# Altium PCB LiBattery-ChargeAndDischarge.PcbDoc
Units mil, origin at the board's own origin, x right, y up, seen from the top; angles counter-clockwise.
Board outline 1280 x 1379 mil, 2 copper layers (Top Layer, Bottom Layer); 38 components, 24 nets, 126 pads, 27 vias.
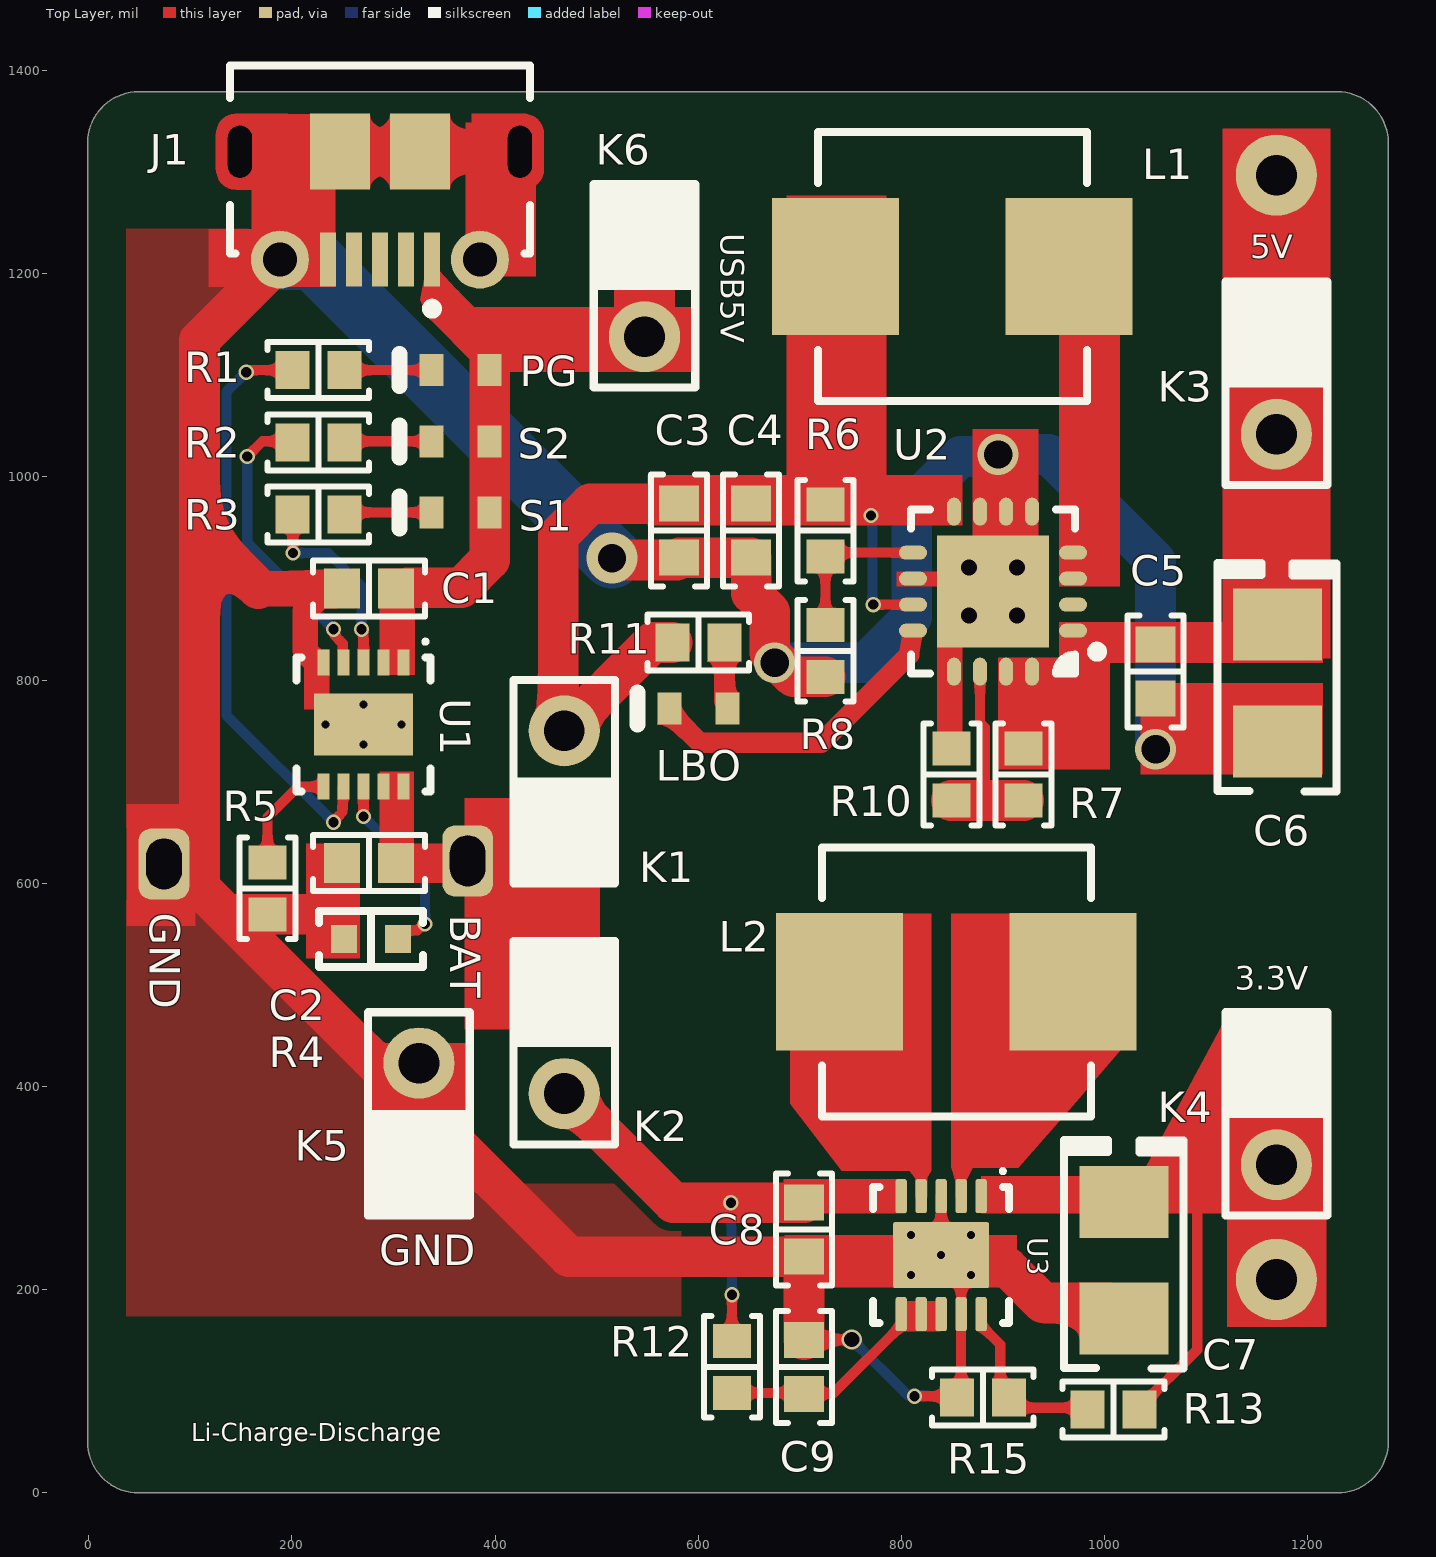
[diagram p0: Top Layer view]
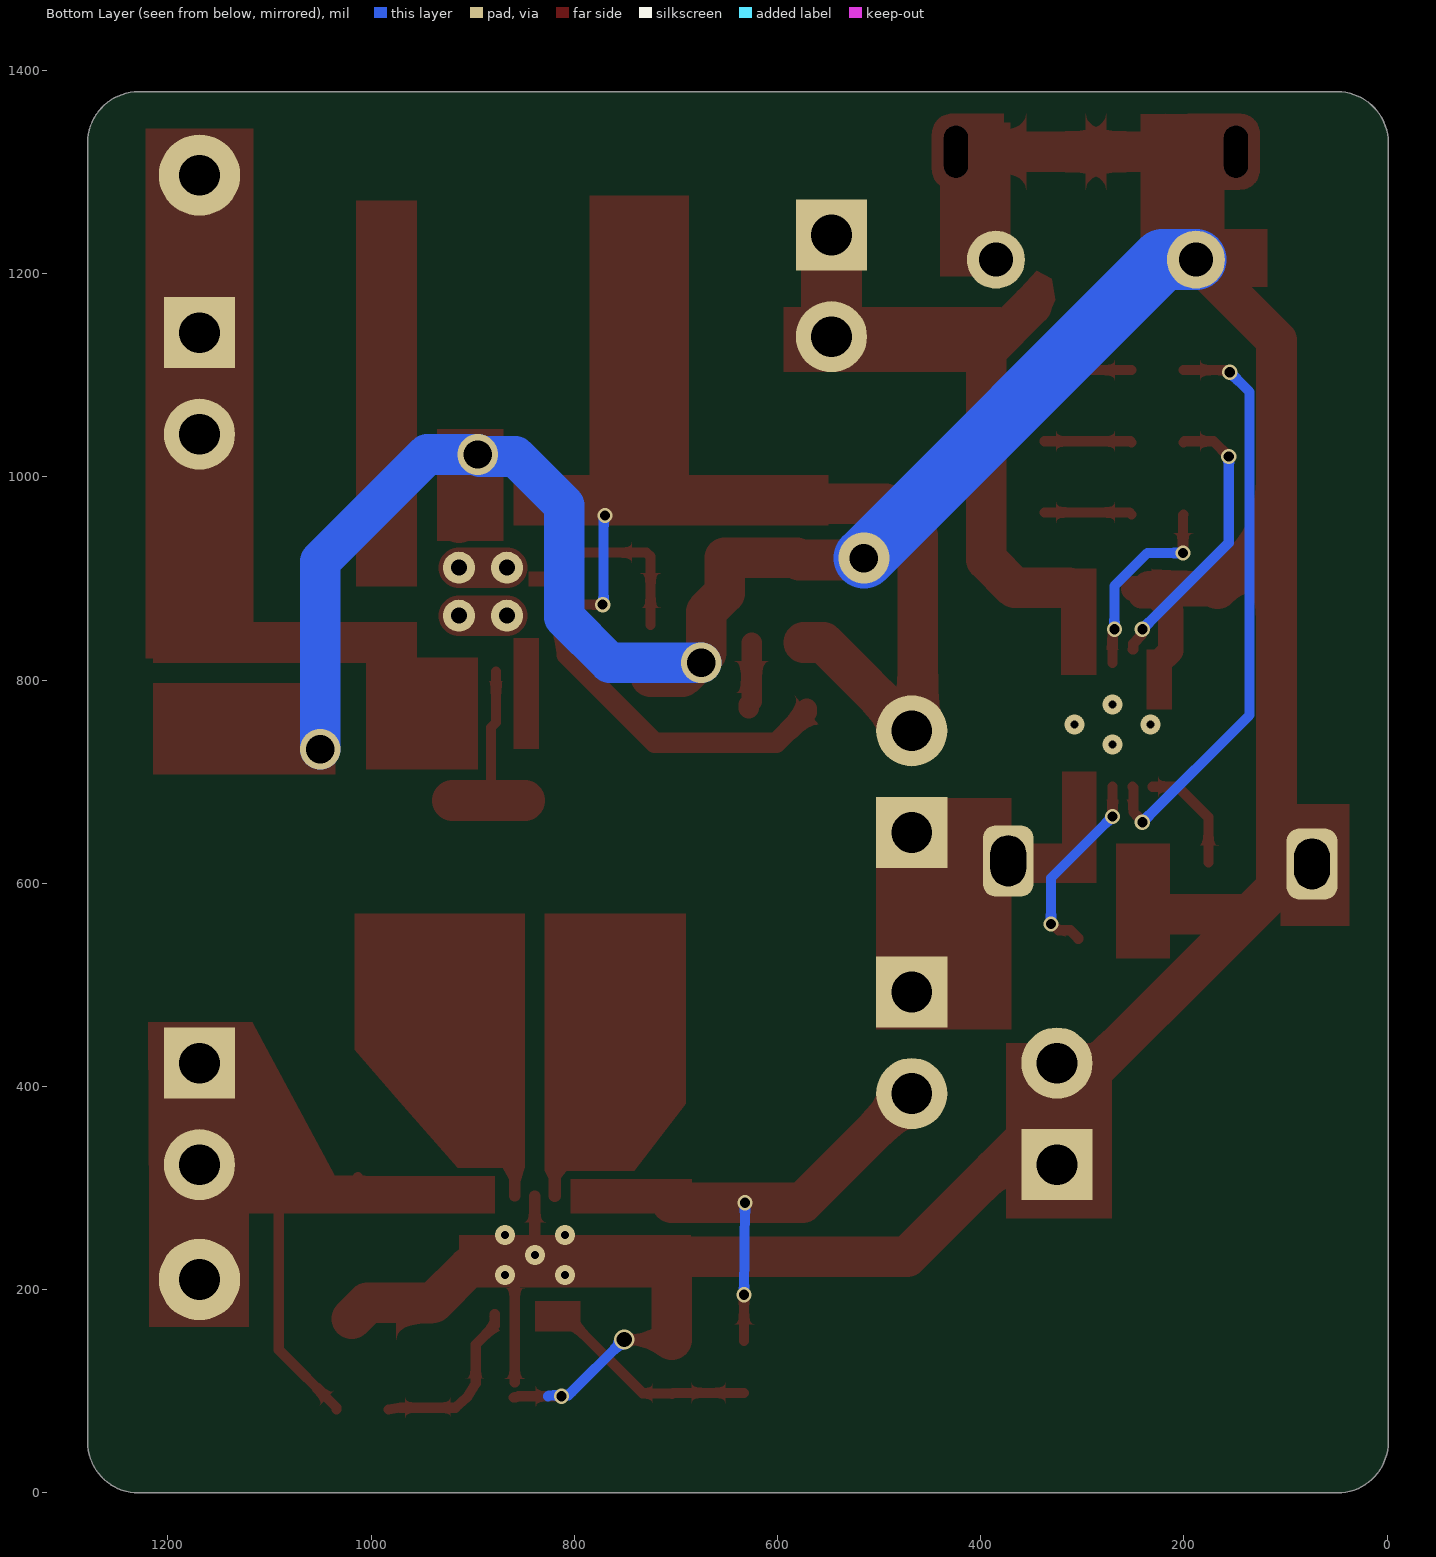
[diagram p1: Bottom Layer view, seen from below]
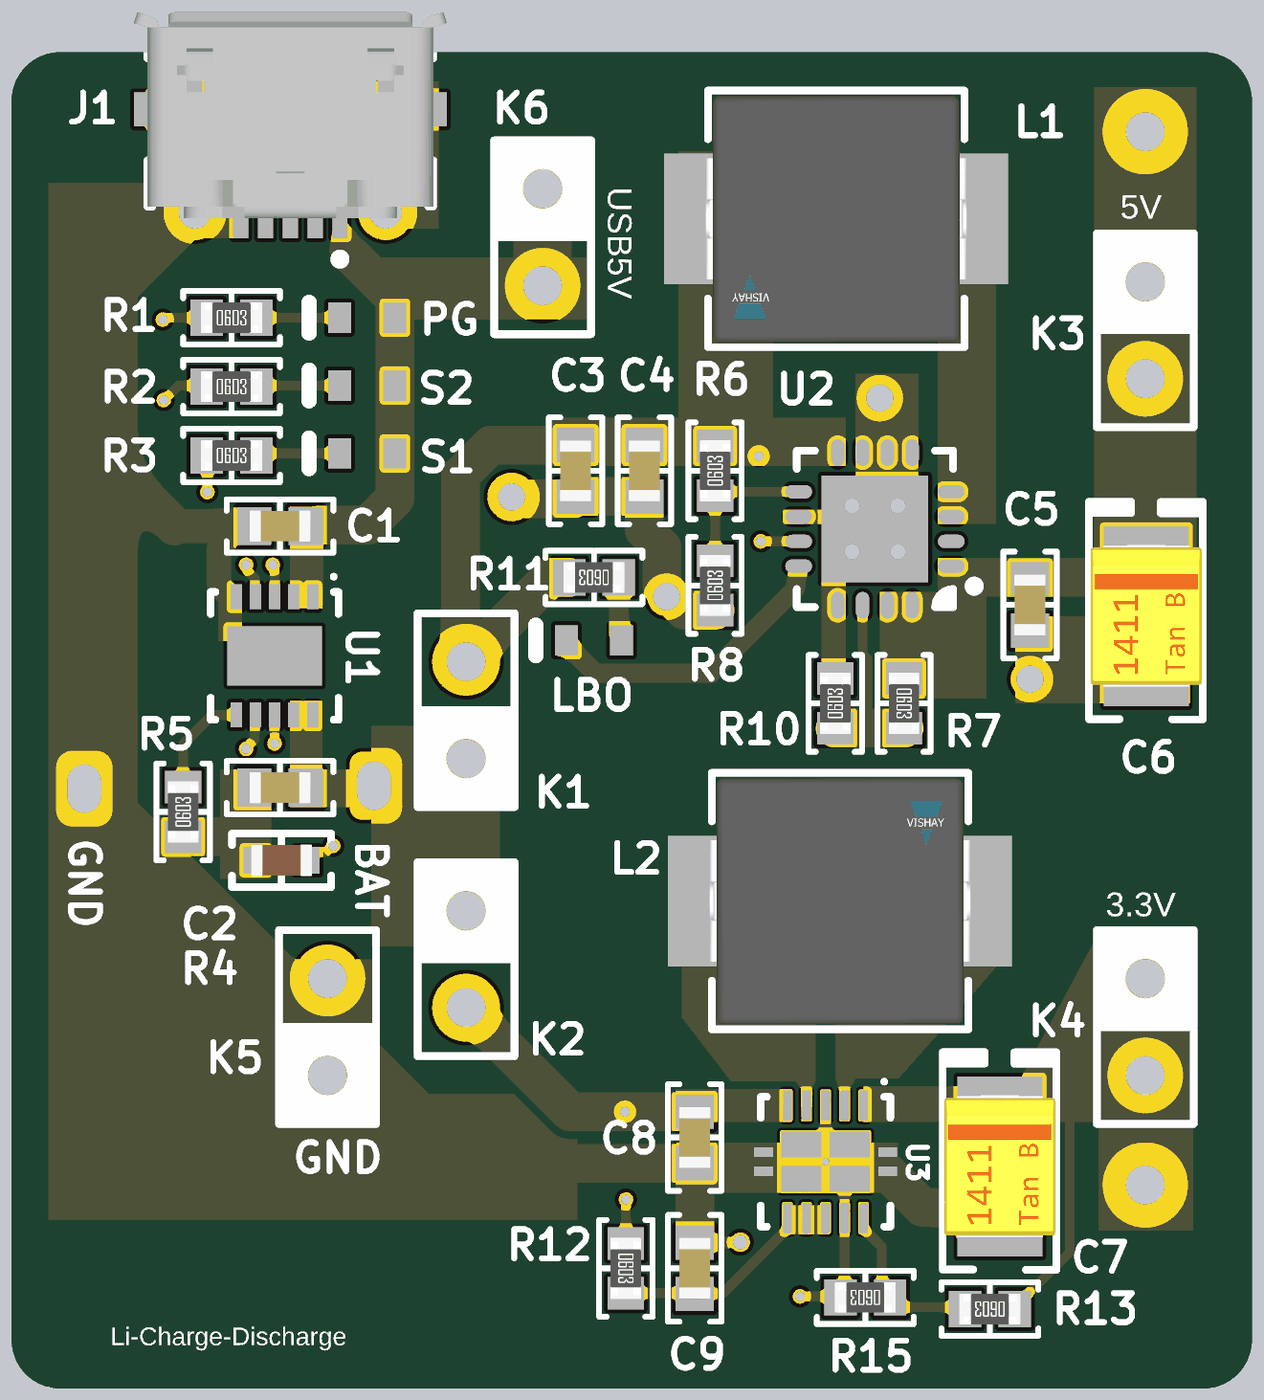
[diagram p2: 3D render of the assembled board from above, using the file's embedded part models]

## Layer stack, top to bottom
Top Solder: solder mask 0.4, Solder Resist, Dk 3.5
Top Layer: signal copper 1.4
Dielectric 1: dielectric 12.6, FR-4, Dk 4.8
Bottom Layer: signal copper 1.4
Bottom Solder: solder mask 0.4, Solder Resist, Dk 3.5

## Board outline
-1,50 -1,1329 cw(c49,1329) 49,1379 1229,1379 cw(c1229,1329) 1279,1329 1279,50 cw(c1229,50) 1229,0 49,0 cw(c49,50)

## Design rules (kind name [scope] priority, off if disabled: settings)
Clearance Clearance_1 [(ObjectKind = 'Pad') And (Component = 'U1')] p1: gap=6 ignorepadtopadclearanceinfootprint=FALSE
Clearance [All] p2: gap=8 ignorepadtopadclearanceinfootprint=FALSE
PolygonConnect [All] p1: connectstyle=Relief reliefconductorwidth=10 reliefentries=4 polygonreliefangle="90 Angle" airgapwidth=10
RoutingVias [All] p1: holewidth=28 width=50 viastyle="Through Hole" minholewidth=7 minwidth=15 maxholewidth=30 maxwidth=50
SolderMaskExpansion [All] p1: expansion=4 istentingtop=FALSE
Width [All] p1: maxlimit=80 minlimit=10 preferedwidth=20
30 further rules are at their usual default settings.

## Components (designator, comment, footprint, x,y, rotation, side; value= is the part's Value field where it differs from the comment)
C1 "4.7µF" "CAP 0603_1608" 276,890 r0 top
C2 "4.7µF" "CAP 0603_1608" 276,620 r0 top
C3 "10µF" "CAP 0603_1608" 581.03,947 r90 top
C4 "0.1µF" "CAP 0603_1608" 652.07,947 r270 top
C5 "2.2µF" "CAP 0603_1608" 1050,808.57 r90 top
C6 "100µF" "CAP POL 1411_3528" 1170,797 r270 top
C7 "33µF" "CAP POL 1411_3528" 1019,229 r270 top
C8 "10µF" "CAP 0603_1608" 704,259 r90 top
C9 "0.1µF" "CAP 0603_1608" 704,124 r90 top
J1 "105017-0001" USB-MICRO-B_V 286.63,1266.85 r180 top
K1 "HEADER-1X2" HEADER-1X2 468,650 r180 top
K2 "HEADER-1X2" HEADER-1X2 468,493 r0 top
K3 "HEADER-1X2" HEADER-1X2 1169,1142 r0 top
K4 "HEADER-1X2" HEADER-1X2 1169,423 r0 top
K5 "HEADER-1X2" HEADER-1X2 325,323 r180 top
K6 "HEADER-1X2" HEADER-1X2 547,1238 r0 top
L1 "6.8µH" FP-IHLP-2525CZ-FP_2_413x3-MFG 850,1207 r180 top
L2 "2.2µH" FP-IHLP-2525CZ-FP_2_413x3-MFG 854,503 r0 top
LBO "TLMS1100-GS08" VISH-TLMX1100_V 600,772 r180 top
PG "TLMS1100-GS08" VISH-TLMX1100_V 366,1105 r180 top
R1 "1 kOhms" "RES 0603_1608" 226,1105 r0 top
R2 "1 kOhms" "RES 0603_1608" 226,1033.97 r0 top
R3 "1 kOhms" "RES 0603_1608" 226,962.93 r0 top
R4 "10 kOhms" "PTC 0603_1608" 277.57,545 r0 top value="470 Ohms"
R5 "1 kOhms" "RES 0603_1608" 176,595 r90 top
R6 "2.145 MOhms" "RES 0603_1608" 725,947 r90 top
R7 "1.8 MOhms" "RES 0603_1608" 920,707 r270 top
R8 "390 kOhms" "RES 0603_1608" 725,828.72 r90 top
R10 "200 kOhms" "RES 0603_1608" 848.97,707 r90 top
R11 "1 kOhms" "RES 0603_1608" 600,837 r180 top
R12 "100 Ohms" "RES 0603_1608" 632.97,124 r270 top
R13 "1 MOhms" "RES 0603_1608" 1008.59,82 r180 top
R15 "178 kOhms" "RES 0603_1608" 880,94 r180 top
S1 "TLMS1100-GS08" VISH-TLMX1100_V 366,965 r180 top
S2 "TLMS1100-GS08" VISH-TLMX1100_V 366,1035 r180 top
U1 "MCP73833T-AMI/MF" DFN-MF10 270.37,756.02 r270 top
U2 "TPS61090RSAR" "TI VQFN-16 4X4MM RSA" 890,887 r180 top
U3 "TPS63000DRCR" DRC0010J_V 839,234 r270 top

## Footprints (in the part's own frame and the unit in brackets; to place one, negate y for a bottom-side part, rotate by r counter-clockwise, add the part's x,y. Pads: shape width x height; smd on the part's side, far side on the other; paste and mask are expansions set on the pad)
"CAP 0603_1608" [mm] "Chip Capacitor, 2-Leads, Body 1.60x0.80mm, IPC Medium Density"
  rect 0.9x1 smd: 1(-0.675,0) 2(0.675,0)
  silkscreen extent -1.4,-0.7 1.4,0.7, body extent -0.8,-0.41 0.8,0.41, height 0.82
"CAP POL 1411_3528" [mm] "Molded Capacitor, 2-Leads, Body 3.50x2.80mm, IPC Medium Density"
  rect 1.8x2.23 smd: 1(-1.46,0) 2(1.46,0)
  silkscreen extent -3,-1.5 2.71,1.48, body extent -1.87,-1.45 1.86,1.45, height 2
DFN-MF10 [mm] "SON, 10-Leads, Body 3x3mm, Pitch 0.5mm, Microchip Recommended"
  rect 0.65x0.3 smd: 1(-1.55,1) 2(-1.55,0.5) 3(-1.55,0) 4(-1.55,-0.5) 5(-1.55,-1) 6(1.55,-1) 7(1.55,-0.5) 8(1.55,0) 9(1.55,0.5) 10(1.55,1)
  rect 1.55x2.48 smd: 11(0,0)
  silkscreen extent -2.12,-1.68 1.67,1.68, body extent -1.52,-1.52 1.52,1.52, height 1
DRC0010J_V [mm] "SON, 10-Leads, Body 3x3mm, Pitch 0.5mm, Thermal Pad 2.4x1.65mm, TI Recommended"
  rrect36% 0.85x0.28 smd paste-0.025 mask+0.07: 1(-1.475,1) 2(-1.475,0.5) 3(-1.475,0) 4(-1.475,-0.5) 5(-1.475,-1) 6(1.475,-1) 7(1.475,-0.5) 8(1.475,0) 9(1.475,0.5) 10(1.475,1)
  rrect6% 1.65x2.4 smd paste-0.825 mask+0.07: 11(0,0)
  Top Layer region: -0.388,-1.901 -0.108,-1.901 -0.108,-1.194 -0.388,-1.194
  Top Layer region: 0.39,-1.194 0.11,-1.194 0.11,-1.901 0.39,-1.901
  Top Layer region: 0.39,1.899 0.11,1.899 0.11,1.194 0.39,1.194
  Top Layer region: -0.388,1.194 -0.108,1.194 -0.108,1.899 -0.388,1.899
  silkscreen extent -2.15,-1.7 1.7,1.7, body extent -1.55,-1.55 1.55,1.55, height 1
FP-IHLP-2525CZ-FP_2_413x3-MFG [mil]
  rect 125x135 smd paste+0 mask+0: 1(-115,0) 2(115,0)
  silkscreen extent -132,-132 132,132, body extent -166,-136 166,136, height 10
HEADER-1X2 [mil]
  rect 70x70 hole 40: 1(0,0)
  round 70 hole 40: 2(0,-100)
  silkscreen extent -50,-150 50,50, body extent -50,-150 50,50, height 470
"PTC 0603_1608" [mm] "Chip Thermistor, 2-Leads, Body 1.60x0.80mm, IPC Medium Density"
  rect 0.65x0.7 smd: 1(-0.675,0) 2(0.675,0)
  silkscreen extent -1.3,-0.7 1.3,0.7, body extent -0.8,-0.41 0.8,0.41, height 0.82
"RES 0603_1608" [mm] "Chip Resistor, 2-Leads, Body 1.60x0.80mm, IPC Medium Density"
  rect 0.85x0.95 smd: 1(-0.65,0) 2(0.65,0)
  silkscreen extent -1.27,-0.7 1.27,0.7, body extent -0.8,-0.4 0.8,0.4, height 0.45
"TI VQFN-16 4X4MM RSA" [mm] "QFN, 16-Leads, Body 4.1x4.1mm (max), Pitch 0.65mm, IPC Medium Density"
  oval 0.7x0.35 smd: 1(-2,0.975) 2(-2,0.325) 3(-2,-0.325) 4(-2,-0.975) 9(2,-0.975) 10(2,-0.325) 11(2,0.325) 12(2,0.975)
  oval 0.35x0.7 smd: 5(-0.975,-2) 6(-0.325,-2) 7(0.325,-2) 8(0.975,-2) 13(0.975,2) 14(0.325,2) 15(-0.325,2) 16(-0.975,2)
  round 0.8 hole 0.4 unplated mask+0.102: 17(-0.6,0.6) 17(-0.6,-0.6) 17(0.6,0.6) 17(0.6,-0.6)
  rect 2.8x2.8 smd: 17(0,0)
  silkscreen extent -2.73,-2.05 2.05,2.05, body extent -2.05,-2.05 2.05,2.05, height 1
USB-MICRO-B_V [mm] "USB, MICRO B, Body 7.491x4.695 mm, Pitch 0.65 mm"
  rect 0.4x1.35 smd: 1(-1.3,1.35) 2(-0.65,1.35) 3(0,1.35) 4(0.65,1.35) 5(1.3,1.35)
  round 1.45 hole 0.85: 6(-2.5,1.35) 7(2.5,1.35)
  rrect50% 0x0 hole 0.6 slot 1.3 at 90 deg: 8(-3.5,-1.35) 11(3.5,-1.35)
  rect 1.5x1.9 smd: 9(-1,-1.35) 10(1,-1.35)
  Top Layer circle w0.5: c3.6,-0.9 r0.25
  Top Layer circle w0.5: c3.6,-1.8 r0.25
  Top Layer circle w0.5: c-3.6,-0.9 r0.25
  Top Layer circle w0.5: c-3.6,-1.8 r0.25
  Top Layer region: -2.3,-2.3 -2.3,-0.4 -3.6,-0.4 -3.6,-2.3
  Top Layer region: 2.3,-0.4 2.3,-2.3 3.6,-2.3 3.6,-0.4
  Top Layer region: 3.6,-0.9 3.6,-1.8 4.1,-1.8 4.1,-0.9
  Top Layer region: -3.6,-1.8 -3.6,-0.9 -4.1,-0.9 -4.1,-1.8
  silkscreen extent -3.75,-3.5 3.75,2.7, body extent -4.1,-3.9 4.1,1.5, height 2.67
VISH-TLMX1100_V [mm] "SMD, 2-Leads, Body 1.6x0.8mm"
  rect 0.6x0.8 smd: 1(-0.725,0) 2(0.725,0)
  silkscreen extent 1.53,-0.4 1.53,0.4, body extent -0.8,-0.4 0.8,0.4, height 0.65

## Part data
C1 C2: library part C0603C105K4RACAUTO, "CAP CER 0603 1UF 16V X7R 10%", Capacitance=1µF, Device Package="0603 (1608 Metric)", Manufacturer=KEMET, Operating Temperature="-55°C ~ 125°C", Ratings=AEC-Q200, Supplier Part Number 1=399-17704-1-ND, Temperature Coefficient=X7R, Tolerance=±10%, Voltage - Rated=16V, Applications="Automotive, Bypass, Decoupling", ComponentLink1Description=Datasheet, ComponentLink1URL=https://api.kemet.com/component-edge/download/datasheet/C0603C105K4RACAUTO.pdf, ComponentLink2Description="DigiKey Link", ComponentLink2URL=http://digikey.com/product-detail/en/kemet/C0603C105K4RACAUTO/399-17704-1-ND/8635855, LastUpdated="2020/9/2 1:03:36", Lifecycle Status=Active, Minimum Order=1, Mounting Type="Surface Mount, MLCC", Package / Case="0603 (1608 Metric)", Packaging=TapeAndReel, Part Number=C0603C105K4RACAUTO, Part Status=Active, PartId=2179, Price=0.02, Series="SMD Auto X7R", Size / Dimension="0.063\" L x 0.031\" W (1.60mm x 0.80mm)", Supplier 1=DigiKey, Thickness (Max)="0.037\" (0.95mm)"
C3 C8: library part GRM188R60J106ME47D, "CAP CER 10UF 6.3V X5R 0603", Device Package="0603 (1608 Metric)", Manufacturer="Murata Electronics", Operating Temperature="-55°C ~ 85°C", Supplier Part Number 1=490-3896-1-ND, Temperature Coefficient=X5R, Tolerance=±20%, Voltage - Rated=6.3V, Applications="General Purpose", Capacitance=10µF, ComponentLink1Description=Datasheet, ComponentLink1URL=https://www.murata.com/~/media/webrenewal/support/library/catalog/products/capacitor/mlcc/c02e.ashx?la=en-us, ComponentLink2Description="DigiKey Link", ComponentLink2URL=http://digikey.com/product-detail/en/murata-electronics/GRM188R60J106ME47D/490-3896-1-ND/965938, LastUpdated="2020/9/2 1:03:35", Lifecycle Status=Active, Minimum Order=1, Mounting Type="Surface Mount, MLCC", Package / Case="0603 (1608 Metric)", Packaging=TapeAndReel, Part Number=GRM188R60J106ME47D, Part Status=Active, PartId=2351, Price=0.03, Series=GRM, Size / Dimension="0.063\" L x 0.031\" W (1.60mm x 0.80mm)", Supplier 1=DigiKey, Thickness (Max)="0.035\" (0.90mm)"
C4: library part 100X14W104MV4T, "CAP CER 0.1UF 10V X7R 0603", Device Package="0603 (1608 Metric)", Manufacturer="Johanson Dielectrics Inc.", Operating Temperature="-55°C ~ 125°C", Supplier Part Number 1=709-1101-1-ND, Temperature Coefficient=X7R, Tolerance=±20%, Voltage - Rated=10V, Applications="Bypass, Decoupling", Capacitance=0.1µF, ComponentLink1Description=Datasheet, ComponentLink1URL=https://www.johansondielectrics.com/downloads/x2y-filter-and-decoupling-capacitors.pdf, ComponentLink2Description="DigiKey Link", ComponentLink2URL=http://digikey.com/product-detail/en/johanson-dielectrics-inc/100X14W104MV4T/709-1101-1-ND/1655915, Features="Low ESL (X2Y)", LastUpdated="2020/9/2 1:03:35", Lifecycle Status=Active, Minimum Order=1, Mounting Type="Surface Mount, MLCC", Package / Case="0603 (1608 Metric)", Packaging=TapeAndReel, Part Number=100X14W104MV4T, Part Status=Active, PartId=2680, Price=0.11, Series=X2Y®, Size / Dimension="0.064\" L x 0.035\" W (1.63mm x 0.89mm)", Supplier 1=DigiKey, Thickness (Max)="0.026\" (0.66mm)"
C5: library part CC0603ZRY5V7BB225, "CAP CER 2.2UF 16V Y5V 0603", Device Package="0603 (1608 Metric)", Manufacturer=Yageo, Operating Temperature="-30°C ~ 85°C", Supplier Part Number 1=311-3416-1-ND, Temperature Coefficient="Y5V (F)", Tolerance="-20%, +80%", Voltage - Rated=16V, Applications="General Purpose", Capacitance=2.2µF, ComponentLink1Description=Datasheet, ComponentLink1URL=http://www.yageo.com/documents/recent/UPY-GPHC_Y5V_6.3V-to-50V_8.pdf, ComponentLink2Description="DigiKey Link", ComponentLink2URL=http://digikey.com/product-detail/en/yageo/CC0603ZRY5V7BB225/311-3416-1-ND/7164437, LastUpdated="2020/9/2 1:03:36", Lifecycle Status=Active, Minimum Order=1, Mounting Type="Surface Mount, MLCC", Package / Case="0603 (1608 Metric)", Packaging=TapeAndReel, Part Number=CC0603ZRY5V7BB225, Part Status=Active, PartId=2203, Price=0.02, Series=CC, Size / Dimension="0.063\" L x 0.031\" W (1.60mm x 0.80mm)", Supplier 1=DigiKey, Thickness (Max)="0.035\" (0.90mm)"
C6 C7: library part CWR11MH105KB, "CAP TANT 1UF 10% 35V 1411", Capacitance=1µF, Device Package="1411 (3528 Metric)", ESR (Equivalent Series Resistance)=6.5Ohm, Manufacturer=KEMET, Manufacturer Size Code=B, Operating Temperature="-55°C ~ 125°C", Supplier Part Number 1=1001-2230-1-ND, Tolerance=±10%, Voltage - Rated=35V, ComponentLink1Description=Datasheet, ComponentLink1URL=https://api.kemet.com/component-edge/download/datasheet/CWR11MH105KB.pdf, ComponentLink2Description="DigiKey Link", ComponentLink2URL=http://digikey.com/product-detail/en/kemet/CWR11MH105KB/1001-2230-1-ND/3317720, Failure Rate="B (0.1%)", Features="High Reliability", Height - Seated (Max)="0.083\" (2.10mm)", LastUpdated="2020/9/2 1:15:46", Lifecycle Status=Active, Minimum Order=1, Mounting Type="Surface Mount", Package / Case="1411 (3528 Metric)", Packaging=TapeAndReel, Part Number=CWR11MH105KB, Part Status=Active, PartId=1, Price=1.20, Series="Military, MIL-PRF-55365/8, CWR11", Size / Dimension="0.138\" L x 0.110\" W (3.50mm x 2.80mm)", Supplier 1=DigiKey, Type=Molded
C9: library part GRM188R60J106ME47D, "CAP CER 10UF 6.3V X5R 0603", Capacitance=10µF, Device Package="0603 (1608 Metric)", Manufacturer="Murata Electronics", Operating Temperature="-55°C ~ 85°C", Supplier Part Number 1=490-3896-1-ND, Temperature Coefficient=X5R, Tolerance=±20%, Voltage - Rated=6.3V, Applications="General Purpose", ComponentLink1Description=Datasheet, ComponentLink1URL=https://www.murata.com/~/media/webrenewal/support/library/catalog/products/capacitor/mlcc/c02e.ashx?la=en-us, ComponentLink2Description="DigiKey Link", ComponentLink2URL=http://digikey.com/product-detail/en/murata-electronics/GRM188R60J106ME47D/490-3896-1-ND/965938, LastUpdated="2020/9/2 1:03:35", Lifecycle Status=Active, Minimum Order=1, Mounting Type="Surface Mount, MLCC", Package / Case="0603 (1608 Metric)", Packaging=TapeAndReel, Part Number=GRM188R60J106ME47D, Part Status=Active, PartId=2351, Price=0.03, Series=GRM, Size / Dimension="0.063\" L x 0.031\" W (1.60mm x 0.80mm)", Supplier 1=DigiKey, Thickness (Max)="0.035\" (0.90mm)"
J1: library part CMP-2000-05827-1, "Micro-USB B Receptacle, Right Angle, Bottom Mount, Surface Mount, with Solder Tabs, -30 to 85 degC, 5-Pin USB, RoHS, Tape and Reel", Manufacturer=Molex, Package Description="5-Leads USB, Micro B, Body 7.5 x 5 mm, Pitch 0.65 mm", Package Reference=MICRO-B, Package Version="Rev. F, 12/2012", Standard Package=1, Voltage - Max=30V, 3D Model=105017-0001.stp, Catalog Drawings=1050170001, Category=Connectors,Interconnects, Circuits=5, Connector Type=USB-microB, Datasheet URL=http://www.molex.com/elqNow/elqRedir.htm?ref=http://www.molex.com/webdocs/datasheets/pdf/en-us/1050170001_IO_CONNECTORS.pdf, Datasheet Version=03/2016, Family=USB,DVI,HDMIConnectors, Featured Product=Micro-USBConnectorsUSBConnectors, Features=Shielded,SolderRetention, Gender=Receptacle, Ingress Protection=-, Manufacturer URL=http://www.molex.com/, Mating Products=WM17145-ND-CABLEMICROUSBBTOSTDA1.0MWM17147-ND-CABLEMICROUSBBTOSTDA2.0MWM17146-ND-CABLEMICROUSBBTOSTDA1.5M, Mounting Technology=SurfaceMount, Mounting Type=BoardCutout,SurfaceMount,RightAngle, Number of Contacts=5, Online Catalog=Molex-MicroUSB, Other Names=WM1399DKR, Package URL=http://www.molex.com/pdm_docs/sd/1050170001_sd.pdf, Packaging=Digi-Reel®, PCN Assembly/Origin=ResinSupplier21/Oct/2015, RoHS Information=1050170001CertofCompliance, Series=-, Specifications=-
K1 K2 K3 K4 K5 K6: Supplier Part Number 1=S1011E-36-ND, REEL=TH, Supplier 1=Digi-Key
L1 L2: library part CMP-02424-000104-1, "Commercial Inductors, High Saturation Series 6.8uH 4.5A 60mΩ 20%", Case Code (Imperial)=2525, Case Code (Metric)=6363, Current Rating=4.5A, DC Resistance (DCR)=60mR, Inductance=6.8uH, Inductance Tolerance=20%, Max DC Current=8A, Max Operating Temperature=125°C, Min Operating Temperature=-55°C, Package Quantity=2000, Self Resonant Frequency=5MHz, Test Frequency=100kHz, Case/Package=2525, Contact Plating=Tin, Core Material=Metal, Depth=6.72mm, Height=3mm, Height - Seated (Max)=0.118inch, Lead Free="Lead Free", Length=7.24mm, Military Standard=Not, Mount="Surface Mount", Number of Pins=2, Packaging="Tape and Reel", Radiation Hardening=No, RMS Current (Irms)=4.5A, Saturation Current=8A, Shielding=Shielded, Termination=SMD/SMT, Tolerance=20%, Width=0.255inch
LBO PG S1 S2: library part CMP-1666-00027-1, "LED, RED, 2.1 V, -40 to 100 degC, 2-Pin SMD (0603), RoHS, Tape and Reel", Capacitance="12 pF", Case Code (Imperial)=0603, Case Code (Metric)=1608, Max Operating Temperature=125degC, Min Operating Temperature=-55degC, Package Quantity=4000, Resistance="100000000000 Ohm", Tolerance=5%, Type (Capacitors)=C0G, Voltage Rating="50 V", Case/Package=0603, ComponentLink1Description="Manufacturer URL", ComponentLink1URL=http://www.vishay.com/, ComponentLink2Description=Datasheet, ComponentLink2URL=http://www.vishay.com/docs/83173/tlmb1100.pdf, DatasheetVersion="Rev. 2.7, 03/2016", Height="0.8 mm", Length="1.6 mm", Mount="Surface Mount", PackageDescription="2-Pin Surface Mount Device, Body 1.6 x 0.8 mm", PackageReference=TLMX1100, Packaging="Tape and Reel", Pins=2, Radiation Hardening=No, REACH SVHC="No SVHC", RoHSCompliant=True, Voltage Rating (DC)="50 V", Width="0.8 mm"
R1 R2 R3 R7 R10 R11 R12 R13 R15: library part RNCS0603BKE10K0, "RES 10K OHM 0.1% 1/16W 0603", Device Package="0603 (1608 Metric)", Manufacturer="Stackpole Electronics Inc", Operating Temperature="-55°C ~ 155°C", Power (Watts)="0.063W, 1/16W", Ratings=AEC-Q200, Resistance="10 kOhms", Supplier Device Package=0603, Supplier Part Number 1=RNCS0603BKE10K0CT-ND, Temperature Coefficient=±25ppm/°C, Tolerance=±0.1%, ComponentLink1Description=Datasheet, ComponentLink1URL=https://www.seielect.com/catalog/sei-rncs_rnch.pdf, ComponentLink2Description="DigiKey Link", ComponentLink2URL=http://digikey.com/product-detail/en/stackpole-electronics-inc/RNCS0603BKE10K0/RNCS0603BKE10K0CT-ND/1800113, Composition="Thin Film", Features="Anti-Corrosive, Automotive AEC-Q200, Moisture Resistant", Height - Seated (Max)="0.022\" (0.55mm)", LastUpdated="2020/9/2 1:10:25", Lifecycle Status=Active, Minimum Order=1, Number of Terminations=2, Package / Case="0603 (1608 Metric)", Packaging=TapeAndReel, Part Number=RNCS0603BKE10K0, Part Status=Active, PartId=4838, Price=0.08, Series=RNCS, Size / Dimension="0.061\" L x 0.031\" W (1.55mm x 0.80mm)", Supplier 1=DigiKey
R4: library part B59641A0145A062, "THERMISTOR PTC 470 OHM 50% 0603", Device Package="0603 (1608 Metric)", Manufacturer="TDK Electronics Inc.", Operating Temperature="-40°C ~ 125°C", Resistance @ 25°C="470 Ohms", Resistance Tolerance=±50%, Supplier Device Package=0603, Supplier Part Number 1=495-4309-1-ND, ComponentLink1Description=Datasheet, ComponentLink1URL=https://www.tdk-electronics.tdk.com/inf/55/db/PTC/PTC_Sensors_SMD_chips_superior.pdf, ComponentLink2Description="DigiKey Link", ComponentLink2URL=http://digikey.com/product-detail/en/tdk-electronics-inc/B59641A0145A062/495-4309-1-ND/2273341, LastUpdated="2020/9/2 1:30:58", Lifecycle Status=Active, Minimum Order=1, Mounting Type="Surface Mount", Package / Case="0603 (1608 Metric)", Packaging=TapeAndReel, Part Number=B59641A0145A062, Part Status=Active, Price=0.18, Series="Automotive, AEC-Q200, B59641", Supplier 1=DigiKey
R5: library part RNCS0603BKE10K0, "RES 10K OHM 0.1% 1/16W 0603", Device Package="0603 (1608 Metric)", Manufacturer="Stackpole Electronics Inc", Operating Temperature="-55°C ~ 155°C", Power (Watts)="0.063W, 1/16W", Ratings=AEC-Q200, Supplier Device Package=0603, Supplier Part Number 1=RNCS0603BKE10K0CT-ND, Temperature Coefficient=±25ppm/°C, Tolerance=±0.1%, ComponentLink1Description=Datasheet, ComponentLink1URL=https://www.seielect.com/catalog/sei-rncs_rnch.pdf, ComponentLink2Description="DigiKey Link", ComponentLink2URL=http://digikey.com/product-detail/en/stackpole-electronics-inc/RNCS0603BKE10K0/RNCS0603BKE10K0CT-ND/1800113, Composition="Thin Film", Features="Anti-Corrosive, Automotive AEC-Q200, Moisture Resistant", Height - Seated (Max)="0.022\" (0.55mm)", LastUpdated="2020/9/2 1:10:25", Lifecycle Status=Active, Minimum Order=1, Number of Terminations=2, Package / Case="0603 (1608 Metric)", Packaging=TapeAndReel, Part Number=RNCS0603BKE10K0, Part Status=Active, PartId=4838, Price=0.08, Resistance="1 kOhms", Series=RNCS, Size / Dimension="0.061\" L x 0.031\" W (1.55mm x 0.80mm)", Supplier 1=DigiKey
R6: library part RMCF0603FT2M32, "RES 2.32M OHM 1% 1/10W 0603", Device Package="0603 (1608 Metric)", Manufacturer="Stackpole Electronics Inc", Operating Temperature="-55°C ~ 155°C", Power (Watts)="0.1W, 1/10W", Ratings=AEC-Q200, Resistance="2.32 MOhms", Supplier Device Package=0603, Supplier Part Number 1=RMCF0603FT2M32CT-ND, Temperature Coefficient=±200ppm/°C, Tolerance=±1%, ComponentLink1Description=Datasheet, ComponentLink1URL=https://www.seielect.com/catalog/sei-rmcf_rmcp.pdf, ComponentLink2Description="DigiKey Link", ComponentLink2URL=http://digikey.com/product-detail/en/stackpole-electronics-inc/RMCF0603FT2M32/RMCF0603FT2M32CT-ND/7790161, Composition="Thick Film", Features="Automotive AEC-Q200", Height - Seated (Max)="0.022\" (0.55mm)", LastUpdated="2020/9/2 1:10:24", Lifecycle Status=Active, Minimum Order=1, Number of Terminations=2, Package / Case="0603 (1608 Metric)", Packaging=CutTape, Part Number=RMCF0603FT2M32, Part Status=Active, PartId=5184, Price=0.10, Series=RMCF, Size / Dimension="0.061\" L x 0.031\" W (1.55mm x 0.80mm)", Supplier 1=DigiKey
R8: library part CRGP0603F390K, "CRGP 0603 390K 1%", Device Package="0603 (1608 Metric)", Manufacturer="TE Connectivity Passive Product", Operating Temperature="-55°C ~ 155°C", Power (Watts)="0.25W, 1/4W", Supplier Device Package=0603, Supplier Part Number 1=A130447CT-ND, Temperature Coefficient=±100ppm/°C, Tolerance=±1%, ComponentLink1Description=Datasheet, ComponentLink1URL=https://www.te.com/commerce/DocumentDelivery/DDEController?Action=srchrtrv&DocNm=9-1773463-9&DocType=DS&DocLang=English, ComponentLink2Description="DigiKey Link", ComponentLink2URL=http://digikey.com/product-detail/en/te-connectivity-passive-product/CRGP0603F390K/A130447CT-ND/8578279, Composition="Thick Film", Features="Pulse Withstanding", Height - Seated (Max)="0.022\" (0.55mm)", LastUpdated="2020/9/2 1:10:24", Lifecycle Status=Active, Minimum Order=1, Number of Terminations=2, Package / Case="0603 (1608 Metric)", Packaging=TapeAndReel, Part Number=CRGP0603F390K, Part Status=Active, PartId=5025, Price=0.02, Resistance="390 kOhms", Series=CRGP, Size / Dimension="0.063\" L x 0.031\" W (1.60mm x 0.80mm)", Supplier 1=DigiKey
U1: library part CMP-0133-00083-1, "Stand-Alone Linear Li-Ion/Li-Polymer Charge Management Controller with Power-Good Output, 4.2V, 10-Pin DFN, Industrial Temperature, Tape and Reel", DatasheetVersion="revB, May-2009", PackageDescription="10-Lead Plastic Dual Flat, No Lead Package (MF) - 3x3x0.9mm Body [DFN]", PackageReference=DFN-MF10, PackageVersion="revBB, Aug-2009"
U2: "IC REG BOOST ADJUSTABLE 2A 16QFN", Current - Output="2A (Switch)", Device Package="16-VQFN Exposed Pad", Frequency - Switching=600kHz, Manufacturer="Texas Instruments", Operating Temperature="-40°C ~ 85°C (TA)", Supplier Device Package="16-QFN (4x4)", Supplier Part Number 1=296-15259-2-ND, Voltage - Input (Max)=5.5V, Voltage - Input (Min)=1.8V, ComponentLink1Description=Datasheet, ComponentLink1URL=http://www.ti.com/general/docs/suppproductinfo.tsp?distId=10&gotoUrl=http%3A%2F%2Fwww.ti.com%2Flit%2Fgpn%2Ftps61090, ComponentLink2Description="DigiKey Link", ComponentLink2URL=//digikey.com/product-detail/en/texas-instruments/TPS61090RSAR/296-15259-2-ND/566911, Function=Step-Up, LastUpdated="2019/12/12 9:54:39", Lifecycle Status=0, Minimum Order=1, Mounting Type="Surface Mount", Number of Outputs=1, Output Configuration=Positive, Output Type=Adjustable, Package / Case="16-VQFN Exposed Pad", Packaging=TapeAndReel, Part Number=TPS61090RSAR, Part Status=Active, Price=1.03, Series=-, Supplier 1=DigiKey, Synchronous Rectifier=Yes, Topology=Boost, Voltage - Output (Max)=5.5V, Voltage - Output (Min/Fixed)=1.8V
U3: library part CMP-0345-00001-2, "Buck-Boost Voltage Converter with 1.8 to 5.5 V Input and 1.2 to 5.5 V Output, -40 to 85 degC, 10-Pin SON (DRC), Green (RoHS & no Sb/Br)", Dynamic Voltage Scaling=TRUE, Manufacturer="Texas Instruments", Switching Frequency(Max)(kHz)=1500, ComponentLink1Description=Datasheet, ComponentLink1URL=http://www.ti.com/general/docs/lit/getliterature.tsp?genericPartNumber=TPS63000&fileType=pdf, ComponentLink2Description="Package Specification", ComponentLink2URL=http://www.ti.com/litv/pdf/mpds117k, DatasheetVersion=SLVS520B, Eco-Plan="Green (RoHS & no Sb/Br)", Iout(Max)(A)=1.2, Iq(Typ)(mA)=0.04, Mounting Technology="Surface Mount", PackageDescription="10-Pin Plastic Small Outline No-Lead, 3 x 3 x 1 mm Body, 0.5 mm Pitch, Exposed Pad", PackageReference=DRC0010J, PackageVersion="revL, Sep-2011", PartNumber=TPS63000DRCR, Regulated Outputs(#)=1, SubFamily="Buck-Boost Regulator", Synchronous Rectification=TRUE, Topology=Buck-Boost, Vin(Max)(V)=5.5, Vin(Min)(V)=1.8, Vout(Max)(V)=5.5, Vout(Min)(V)=1.2

## Free pads (board coordinates)
  rrect50% 50x70 hole 50 slot 35 at 0 deg: 1(74,619) 1(373,622)
  round 80 hole 40: 2(1169,1297) 3(1169,210)

## Via types
v1: diameter 15, hole 10, Top Layer to Bottom Layer, 13 vias
v2: diameter 19.68, hole 7.87, Top Layer to Bottom Layer, 5 vias
v3: diameter 19.68, hole 7.87, Top Layer to Bottom Layer, tented top, 4 vias
v4: diameter 40, hole 28, Top Layer to Bottom Layer, 3 vias
v5: diameter 50, hole 28, Top Layer to Bottom Layer, 1 vias
v6: diameter 20, hole 15, Top Layer to Bottom Layer, 1 vias

## Nets (pads, with @x,y where several pads share a name; then routed paths per layer and width w, separated by ;. In a path a pad name is that pad's centre, name@x,y a point inside that pad or via, vN(x,y) a via of type N, cw(c..) or ccw(c..) an arc to the next point about the centre after c; other vN are vias at no path point)
3.3V: C7.1 K4.1 K4.2 pad.3 R13.1 U3.1 | length 219.9
  Top Layer w10: C7.1@1013,311 C7.1@1014,310 ; R13.1 1034.18,83.97 1091,140.79 1091,277
5V: C5.2 C6.1 K3.1 K3.2 pad.2 R7.1 U2.1 U2.15 U2.16
GND: C1.1 C2.1 C3.1 C4.2 C5.1 C6.2 C7.2 C8.1 C9.2 J1.5 J1.6 J1.7 J1.8 J1.9 J1.10 J1.11 K5.1 K5.2 pad.1@74,619 R4.1 R5.1 R8.1 R10.2 R15.2 U1.5 U1.11 U2.5 U2.6 U2.7 U2.10 U2.13 U2.17 U3.3 U3.9 U3.11 | length 4339.3
  Top Layer w10: C9.2 751,150.57 v6(751,151) ; v1(812.66,95) R15.2@854.76,95 ; v2(839,234) 858.69,234 U3.9 R15.2@858.69,108.72 ; R15.2@854.79,94.98 ccw(c860.07,108.72) R15.2@860.07,94
  Top Layer w11: v2(839,234) U3.3
  Top Layer w25: 224.41,817.34 213,828.75 213,868.14 227.65,882.79 C1.1@242.21,882.79 ; C1.1@234.19,890 C1.1
  Top Layer w35: 167,890 C1.1@234.19,890
  Top Layer w40: J1.11 J1.10 J1.9 J1.8 ; 167,890 109,948 ; J1.7 109,1134.5 109,948 ; 218,569 217.59,569.41 R5.1 135.59,569.41 ; K5.1 325,380 ; K5.2 325,380 ; v5(515,920) 516.86,918.14 578.75,918.14 C3.1 C4.2 652.07,885.55 670.32,867.3 670.32,826.56 693.75,803.13 R8.1 ; C9.2 C8.1 472.57,232.43 325,380 ; U2.17@866.38,863.38 U2.17@913.62,863.38 ; U2.17@866.38,910.62 U2.17@913.62,910.62 ; U2.6 913.62,954.91 ; 904,222 939.05,186.95 1003.57,186.95 C7.2 ; 109,948 109,596 135.59,569.41 ; 135.59,569.41 325,380
  Bottom Layer w10: v6(751,151) 806.04,95.96 825.04,95.96 826,95
  Bottom Layer w40: v4(675,817) 765.2,817 810.1,861.9 810.1,972.1 858.09,1020.09 893.09,1020.09 v4(895,1022) 945,1022 1050,917 v4(1050,732)
  Bottom Layer w60: J1.7 221.3,1213.7 v5(515,920)
  other v2: 809.47,214.32 868.53,214.32 809.47,253.68 868.53,253.68
  other v3: 270.37,736.34 232.97,756.02 307.77,756.02 270.37,775.71
NetC9_1: C9.1 R12.2 U3.6 U3.7 U3.8 | length 206.2
  Top Layer w10: R12.2 703.02,98.41 C9.1 704.48,97.91 732.83,97.91 799.63,164.71 U3.6
NetL1_1: L1.1 U2.3 U2.4
NetL2_1: L2.1 U3.4 | length 25.9
  Top Layer w12: U3.4 819.32,318
NetL2_2: L2.2 U3.2 | length 28.6
  Top Layer w11: U3.2 858.69,320.69
NetLBO_1: LBO.1 R11.1 | length 66.2
  Top Layer w20: R11.1 625.59,778.89 628.54,775.94 LBO.1
NetLBO_2: LBO.2 U2.12 | length 306.7
  Top Layer w20: LBO.2 571.46,768.06 601.27,738.25 721.01,738.25 807.48,824.72 U2.12@810.39,843.1
NetPG_2: PG.2 R1.2 | length 85.9
  Top Layer w10: R1.2 PG.2
NetR1_1: R1.1 U1.7 | length 580.1
  Top Layer w10: v1(155,1103) 156.35,1103 158.35,1105 R1.1 ; v1(241,660) 241,661.35 249.78,670.13 249.78,694.09 U1.7
  Bottom Layer w10: v1(155,1103) 154.89,1103 135.5,1083.61 135.5,765.5 v1(241,660)
NetR2_1: R2.1 U1.4 | length 280.1
  Top Layer w10: v1(156,1020) 171,1035 199.38,1035 R2.1 ; v1(241,850) 241.96,849.04 241.96,843.84 250,835.8 250,830.37 250.37,830
  Bottom Layer w10: v1(156,1020) 156,935 v1(241,850)
NetR2_2: R2.2 S2.2 | length 86.3
  Top Layer w10: R2.2 252.62,1035 S2.2
NetR3_1: R3.1 U1.3 | length 195.4
  Top Layer w10: R3.1 201,962.34 v1(201,925) ; v1(268.5,850) 268.5,848.65 270.37,846.78 U1.3
  Bottom Layer w10: v1(201,925) 236,925 268.5,892.5 v1(268.5,850)
NetR3_2: R3.2 S1.2 | length 86.7
  Top Layer w10: R3.2 253.66,965 S1.2
NetR4_2: R4.2 U1.8 | length 193.7
  Top Layer w10: v1(270.37,665.63) U1.8 ; R4.2 304.15,545.98 311.94,553.78 323.43,553.78 329.54,559.9 v1(330.9,559.9)
  Bottom Layer w10: v1(270.37,665.63) 330.9,605.1 v1(330.9,559.9)
NetR5_2: R5.2 U1.6 | length 111.8
  Top Layer w10: R5.2 176,665 206,695 U1.6
NetR6_1: R6.1 R8.2 U2.9 | length 155
  Top Layer w10: R8.2 R6.1 728.98,925.39 U2.9
NetR7_2: R7.2 R10.1 U2.14 | length 200.9
  Top Layer w10: U2.14 877.2,758.17 882,753.37 882,683.89 884.48,681.41
  Top Layer w40: R10.1 884.48,681.41 R7.2
NetR13_2: R13.2 R15.1 U3.10 | length 173.5
  Top Layer w10: U3.10 878.37,164.71 897.13,145.95 897.13,107.7 R15.1 917.32,83.82 971.27,83.82 R13.2
USB_5V: C1.2 J1.1 K6.1 K6.2 PG.1 S1.1 S2.1 U1.1 U1.2 | length 473.1
  Top Layer w30: C1.2 302.57,891.97 C1.2@312,891.97
  Top Layer w40: C1.2@313.24,890.73 366.73,890.73 394.54,918.54 S1.1 S2.1 PG.1 394.54,1124.25 349.9,1168.9
  Top Layer w60: K6.2 K6.1
VBAT: C2.2 K1.1 K2.1 pad.1@373,622 U1.9 U1.10 | length 3.5
  Top Layer w40: K1.1@458,649 K1.1@460.5,646.5
VBAT_OUT1: C3.2 C4.1 K1.2 L1.2 R6.2 R11.2 U2.8 U2.11 | length 598.7
  Top Layer w10: v1(772.2,874.2) U2.11
  Top Layer w20: C3.2@571.57,973.57 C3.2 ; R11.2 R11.2@574.41,838.97
  Top Layer w40: C3.2@571.57,973.57 493.62,973.57 462,941.95 462,777.21 462.26,776.95 462.26,755.74 K1.2 555,837 R11.2
  Bottom Layer w10: v1(770,962) 771.25,960.75 771.25,875.16 v1(772.2,874.2)
VBAT_OUT2: C8.2 K2.2 R12.1 U3.5 | length 416.5
  Top Layer w10: R12.1 v1(633,195)
  Top Layer w40: K2.2 575.43,285.57 v1(632,285.57) C8.2
  Bottom Layer w10: v1(632,285.57) v1(633,195)
pads on no net: J1.2 J1.3 J1.4 U2.2

## Polygon pours and split planes (outlines as drawn)
GND on Top Layer "GND_L01_P000" (solid, remove dead copper, pour order 0): 56,1244 37,1244 37,174 583,174 583,304 382,304 122.3,582.7 129,1145 231,1244

## Other copper
Top Layer:
  rectangle net USB_5V: 380,1103 594,1167
  rectangle net 3.3V: 1120.48,163 1218.48,282
  rectangle net GND: 271,270 375,443
  rectangle net GND: 37,558 105,678
  rectangle net 5V: 1116,821 1222,1343
  rectangle net 3.3V: 878,275 1021,312
  rectangle net GND: 118,1187 222,1244
  rectangle net GND: 371,1197 440,1349
  rectangle net GND: 214,526 267,639
  rectangle net GND: 160,1187 243,1357
  rectangle net VBAT: 286,600 364,639
  region net VBAT: 286,710 286,600 320,600 320,710
  rectangle net VBAT: 370,456 503,684
  rectangle net NetC9_1: 794,159 839,189
  rectangle net GND: 685,202 913.77,254
  rectangle net VBAT_OUT2: 684,275 804,309
  rectangle net GND: 870,937 935,1047
  rectangle net GND: 1035,707 1215,797
  rectangle net GND: 835,732 860,841.41
  rectangle net GND: 795,892 845,907
  rectangle net 5V: 955,817 1215,857
  rectangle net 5V: 955,807 985,857
  rectangle net 5V: 895,712 1005,822
  rectangle net NetL1_1: 955,892 1015,1272
  rectangle net VBAT_OUT1: 687,962 785,1277
  rectangle net VBAT_OUT1: 550,952 860,1002
  region net GND: 212,830 212,771 237,771 237,830
  region net USB_5V: 286,910 286,805 321,805 321,910
  region net NetL2_2: 854,304.24 849,321 854,321
  region net NetL2_2: 864.12,308.71 870.82,321 863,321
  region net NetL2_1: 814,309 814,318 807.25,318
  region net NetL2_1: 825,309.5 829,317 825,318
  region net USB_5V: 345,1203 361,1185 332,1162 326.53,1174.16 330,1195
  region net NetL2_2: 1016,570 849,570 849,320 914.64,320 972,385 1016,436
  region net NetL2_1: 690.5,570 829,570 829,317 741.31,317 690.5,383
  region net 3.3V: 1006,312 1036,312 1117,463 1219.48,463 1218.48,275 1002,275

## Silkscreen, mask and mechanical layers (free items; w line width, h text height)
Top Overlay:
  text "USB5V" at 614.43,1240 h40 r270
  text "5V" at 1143,1207.43 h40
  text "GND" at 60,571 h30 r270
  text "BAT" at 356,569 h30 r270
  text "3.3V" at 1128,487.43 h40
  text "GND" at 286,224 h30
  text "Li-Charge-Discharge" at 101,44.65 h30
Mechanical 1:
  lines w10: -6,49.97 ccw(c49,50) 48.97,-5 ; -6,49.97 cw(c49,50) -6,50 ; -6,49.97 cw(c-1,50) -6,50 ; -6,50 -6,1329 ; -6,1329 cw(c49,1329) -6,1329.03 ; -6,1329 cw(c-1,1329) -6,1329.03 ; -6,1329.03 cw(c49,1329) 48.97,1384 ; 48.97,-5 ccw(c49,0) 49,-5 ; 48.97,-5 ccw(c49,50) 49,-5 ; 48.97,1384 cw(c49,1379) 49,1384 ; 48.97,1384 cw(c49,1329) 49,1384 ; 49,-5 1229,-5 ; 49,1384 1229,1384 ; 1229,-5 ccw(c1229,50) 1229.03,-5 ; 1229,-5 ccw(c1229,0) 1229.03,-5 ; 1229,1384 cw(c1229,1329) 1229.03,1384 ; 1229,1384 cw(c1229,1379) 1229.03,1384 ; 1229.03,-5 ccw(c1229,50) 1284,49.97 ; 1229.03,1384 cw(c1229,1329) 1284,1329.03 ; 1284,49.97 ccw(c1279,50) 1284,50 ; 1284,49.97 ccw(c1229,50) 1284,50 ; 1284,50 1284,1329 ; 1284,1329 ccw(c1279,1329) 1284,1329.03 ; 1284,1329 ccw(c1229,1329) 1284,1329.03

## Text inside footprints (layer, text, board x,y; h text height)
J1: Mechanical 1 "PCB EDGE" at 570.09,1381.02 h11.81 r180